# EAGLE board Bus mixer - vco - juno (EAGLE 9.6.2), part 1 of 2
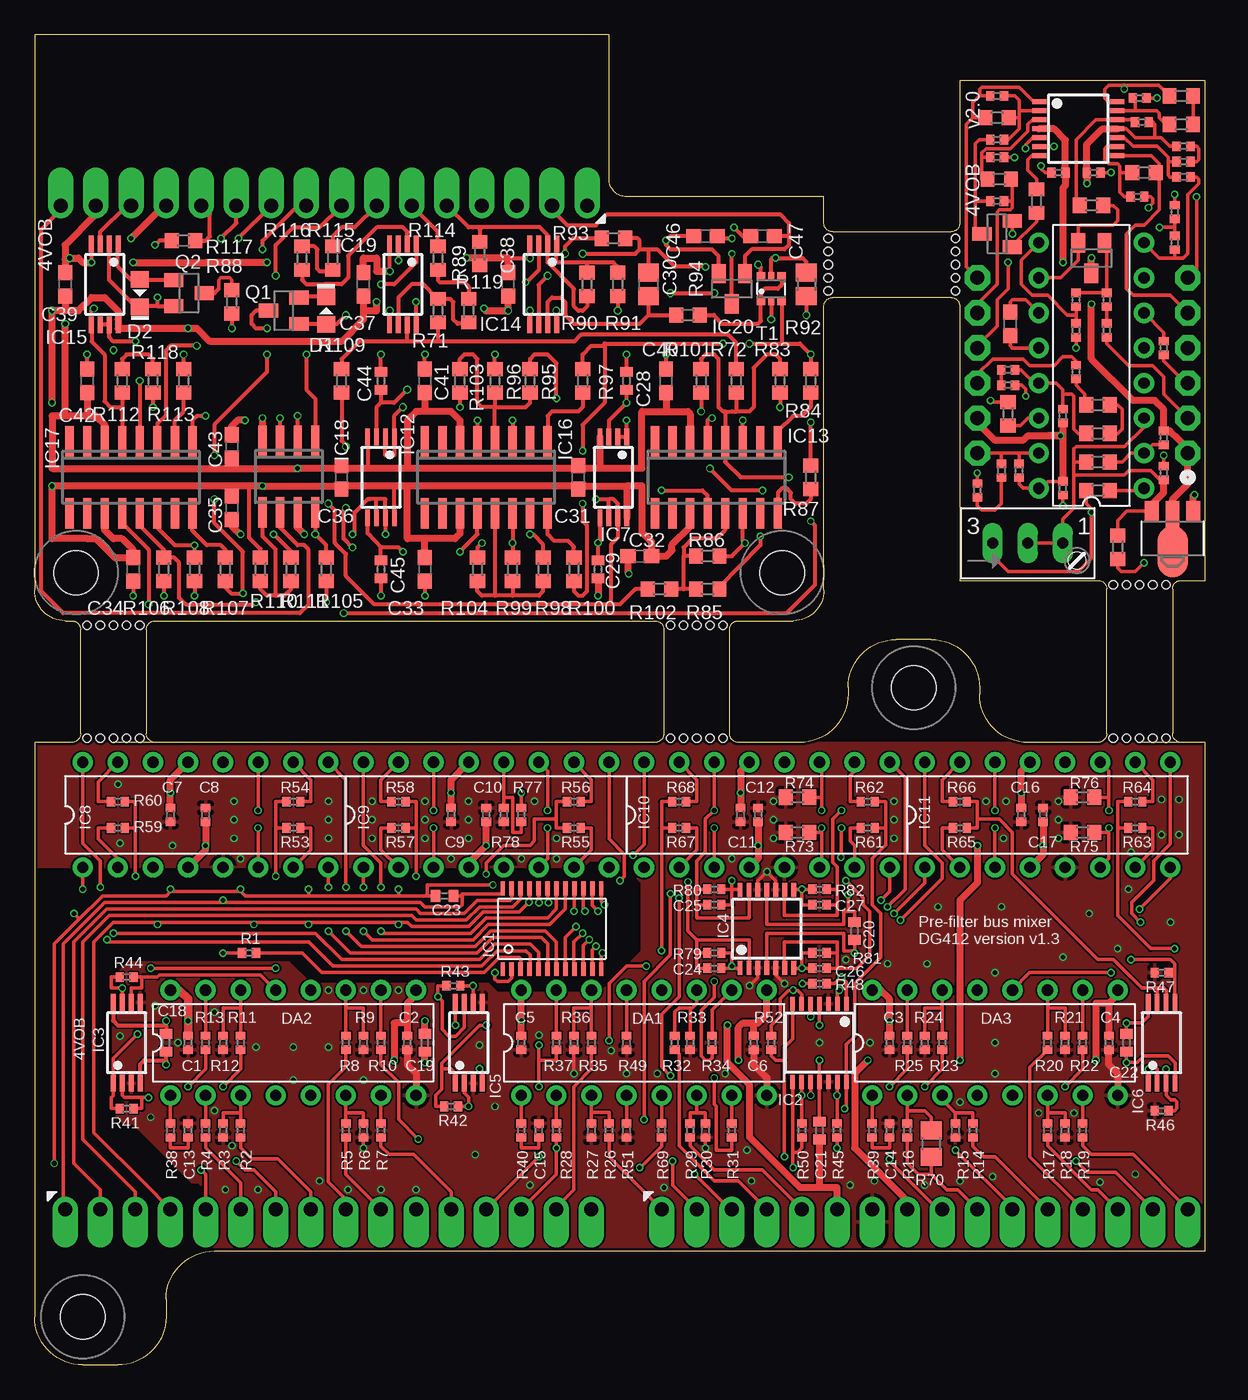
[diagram p0: board, top side]
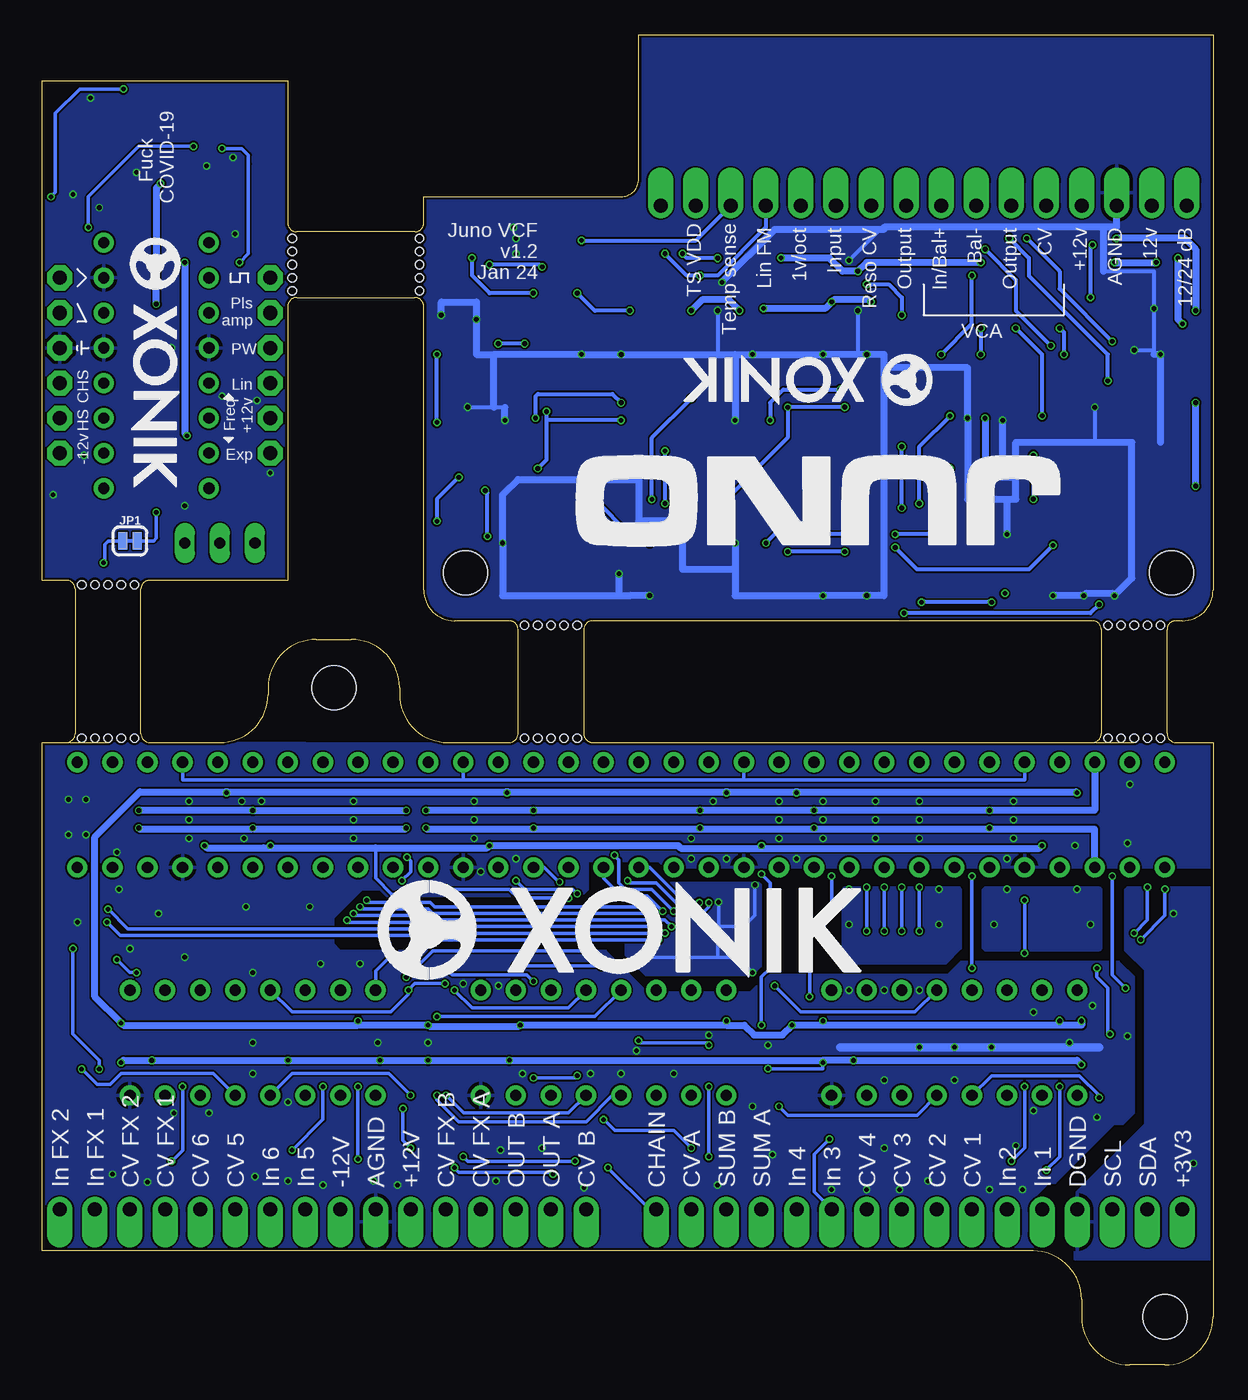
[diagram p1: board, bottom side, seen from below]

Size 84.77 x 96.36 mm. Coordinates in mm from the lower left corner, seen from the top.
Outline: 83.03,45.09 84.77,45.09 84.77,8.26 13.02,8.26 arc90 9.53,4.76 9.53,3.49 arc-90 6.03,0 3.49,0 arc-90 0,3.49 0,45.09 2.7,45.09 arc90 3.33,45.72 3.33,53.26 arc90 2.7,53.9 2.22,53.9 arc-90 0,56.12 0,87.15 0,96.36 41.59,96.36 41.59,85.88 arc90 42.86,84.61 57.15,84.61 57.15,82.71 arc90 57.78,82.07 66.36,82.07 arc90 66.99,82.71 66.99,93.03 84.77,93.03 84.77,56.83 83.03,56.83 arc90 82.39,56.2 82.39,45.72 arc90 83.03,45.09
Outline: 83.03,45.09 80.01,45.09
Outline: 8.73,45.09 11.75,45.09 44.93,45.09 arc90 45.56,45.72 45.56,53.26 arc90 44.93,53.9 8.73,53.9 arc90 8.1,53.26 8.1,45.72 arc90 8.73,45.09
Outline: 8.73,45.09 5.71,45.09
Outline: 76.99,45.09 73.98,45.09 71.91,45.09 arc-90 68.42,48.58 68.42,49.05 arc90 64.93,52.55 62.39,52.55 arc90 58.9,49.05 58.9,48.58 arc-90 55.4,45.09 50.96,45.09 arc-90 50.32,45.72 50.32,53.26 arc-90 50.96,53.9 54.93,53.9 arc90 57.15,56.12 57.15,76.68 arc-90 57.78,77.31 66.36,77.31 arc-90 66.99,76.68 66.99,56.83 76.99,56.83 arc-90 77.63,56.2 77.63,45.72 arc-90 76.99,45.09
Copper layers (1*16): Top 0.035mm / dielectric 1.6mm / Bottom 0.035mm
Design rules "jlcpcb-2layers *": minimum track width 5mil, minimum drill 0.3mm, track to track 5mil, track to pad 5mil, pad to pad 5mil, via to via 5mil, smd to smd 5mil, copper to edge 0.2mm, drill to drill 6mil, minimum pad ring 10mil, minimum via ring 4mil, stop-mask expansion 4mil, vias tented up to drill 0mil, thermal gap 10mil
Holes 3.2 mm at 63.66,49.05 3.49,3.49 54.13,57.38 3.02,57.38
Holes 0.6 mm at 57.47,81.6 57.47,80.64 57.47,79.69 57.47,78.74 57.47,77.79 66.67,81.6 66.67,80.64 66.67,79.69 66.67,78.74 66.67,77.79 81.92,56.52 80.96,56.52 80.01,56.52 79.06,56.52 78.11,56.52 81.92,45.4 80.96,45.4 80.01,45.4 79.06,45.4 78.11,45.4 49.85,45.4 48.9,45.4 47.94,45.4 46.99,45.4 46.04,45.4 7.62,45.4 6.67,45.4 5.71,45.4 4.76,45.4 3.81,45.4 3.81,53.58 46.04,53.58 46.99,53.58 47.94,53.58 48.9,53.58 49.85,53.58 4.76,53.58 5.71,53.58 6.67,53.58 7.62,53.58

## Footprints (pad centres in the part's own frame; a part is rotated, then mirrored left to right if it is on the bottom)
C0402-J = smd 0.6 x 0.7: 1 -0.5,0; 2 0.5,0
C0402 = smd 0.7 x 0.9: 1 -0.65,0; 2 0.65,0
C0805 = smd 1.3 x 1.5: 1 -0.85,0; 2 0.85,0
C0603 = smd 1.1 x 1: 1 -0.85,0; 2 0.85,0
D0805-J = smd 1.2 x 1.3: A 1,0; C -1,0
DIL16J = drill 0.813: 1 -8.89,-3.81; 2 -6.35,-3.81; 3 -3.81,-3.81; 4 -1.27,-3.81; 5 1.27,-3.81; 6 3.81,-3.81; 7 6.35,-3.81; 8 8.89,-3.81; 9 8.89,3.81; 10 6.35,3.81; 11 3.81,3.81; 12 1.27,3.81; 13 -1.27,3.81; 14 -3.81,3.81; 15 -6.35,3.81; 16 -8.89,3.81
TSSOP24J = smd 0.305 x 0.991: 1 -3.575,-2.918; 2 -2.925,-2.918; 3 -2.275,-2.918; 4 -1.625,-2.918; 5 -0.975,-2.918; 6 -0.325,-2.918; 7 0.325,-2.918; 8 0.975,-2.918; 9 1.625,-2.918; 10 2.275,-2.918; 11 2.925,-2.918; 12 3.575,-2.918; 13 3.575,2.918; 14 2.925,2.918; 15 2.275,2.918; 16 1.625,2.918; 17 0.975,2.918; 18 0.325,2.918; 19 -0.325,2.918; 20 -0.975,2.918; 21 -1.625,2.918; 22 -2.275,2.918; 23 -2.925,2.918; 24 -3.575,2.918
TSSOP14J = smd 0.35 x 1: 1 -1.95,-2.825; 2 -1.3,-2.825; 3 -0.65,-2.825; 4 0,-2.825; 5 0.65,-2.825; 6 1.3,-2.825; 7 1.95,-2.825; 8 1.95,2.825; 9 1.3,2.825; 10 0.65,2.825; 11 0,2.825; 12 -0.65,2.825; 13 -1.3,2.825; 14 -1.95,2.825
TSSOP8J = smd 1.2 x 0.35: 1 -2.925,0.975; 2 -2.925,0.325; 3 -2.925,-0.325; 4 -2.925,-0.975; 5 2.925,-0.975; 6 2.925,-0.325; 7 2.925,0.325; 8 2.925,0.975
SO16-NARROW-J = smd 0.6 x 2.2: 1 -4.445,-2.6; 2 -3.175,-2.6; 3 -1.905,-2.6; 4 -0.635,-2.6; 5 0.635,-2.6; 6 1.905,-2.6; 7 3.175,-2.6; 8 4.445,-2.6; 9 4.445,2.6; 10 3.175,2.6; 11 1.905,2.6; 12 0.635,2.6; 13 -0.635,2.6; 14 -1.905,2.6; 15 -3.175,2.6; 16 -4.445,2.6
SO08 = smd 0.6 x 2.2: 1 -1.905,-2.6; 2 -0.635,-2.6; 3 0.635,-2.6; 4 1.905,-2.6; 5 1.905,2.6; 6 0.635,2.6; 7 -0.635,2.6; 8 -1.905,2.6
SOT23J = smd 1 x 1.4: 1 -0.95,-1.1; 2 0.95,-1.1; 3 0,1.1
SOT89 = smd 1 x 1.5: 1 -1.499,-1.981; 3 1.499,-1.981 | smd 1 x 2: 2 0,-1.727 | smd 2.2 x 3.7: 2@1 0,0.94
SMT-JUMPER_2_NC_TRACE_SILK = smd 0.66 x 1.27: 1 -0.521,0; 2 0.521,0
SOT23-BEC = smd 1 x 1.4: B -0.95,-1.1; C 0,1.1; E 0.95,-1.1
R0402 = smd 0.6 x 0.7: 1 -0.5,0; 2 0.5,0
R0805 = smd 1.3 x 1.5: 1 -0.95,0; 2 0.95,0
R0603 = smd 1 x 1.1: 1 -0.85,0; 2 0.85,0
R0805' = smd 1.3 x 1.5: 1 -0.85,0; 2 0.85,0
S64W = drill 0.813 long: A 2.54,1.27; E -2.54,1.27; S 0,1.27
SOT363J = smd 0.6 x 0.6: 1 -0.9,0.75; 3 -0.9,-0.75; 4 0.9,-0.75; 6 0.9,0.75 | smd 0.6 x 0.4: 2 -0.9,0; 5 0.9,0
SIP-PIN16-1J = drill 1.016 offset: 1 -19.05,0; 2 -16.51,0; 3 -13.97,0; 4 -11.43,0; 5 -8.89,0; 6 -6.35,0; 7 -3.81,0; 8 -1.27,0; 9 1.27,0; 10 3.81,0; 11 6.35,0; 12 8.89,0; 13 11.43,0; 14 13.97,0; 15 16.51,0; 16 19.05,0
MA06N-1J = drill 1.016 octagon: 1 -6.35,0; 2 -3.81,0; 3 -1.27,0; 4 1.27,0; 5 3.81,0; 6 6.35,0

## Placement (x,y rotation side)
C1  1uF  [C0402-J]  11.11,23.34 90 top
C2  1uF  [C0402-J]  26.99,23.34 270 top
C3  1uF  [C0402-J]  61.91,23.34 90 top
C4  1uF  [C0402-J]  77.79,23.34 270 top
C5  1uF  [C0402-J]  35.24,23.34 90 top
C6  1uF  [C0402-J]  52.07,23.34 270 top
C7  1uF  [C0402-J]  9.84,39.85 90 top
C8  1uF  [C0402-J]  12.38,39.85 90 top
C9  1uF  [C0402-J]  30.16,39.85 90 top
C10  1uF  [C0402-J]  32.7,39.85 90 top
C11  1uF  [C0402-J]  51.12,39.85 90 top
C12  1uF  [C0402-J]  52.39,39.85 90 top
C13  5nF  [C0402-J]  11.11,16.99 270 top
C14  5nF  [C0402-J]  61.91,16.99 270 top
C15  5nF  [C0402-J]  36.51,16.99 270 top
C16  1uF  [C0402-J]  71.44,39.85 90 top
C17  1uF  [C0402-J]  73.03,39.85 90 top
C18  1uF  [C0402]  9.53,23.34 90 top
C19  1uF  [C0402]  28.26,23.34 90 top
C20  1uF  [C0402]  59.37,31.43 270 top
C21  1uF  [C0402]  56.83,16.99 270 top
C22  1uF  [C0402]  79.06,23.34 90 top
C23  1uF  [C0402]  29.69,33.97 0 top
C24  33pF  [C0402-J]  49.21,29.84 0 top
C25  33pF  [C0402-J]  49.21,33.34 0 top
C26  33pF  [C0402-J]  56.83,29.84 180 top
C27  33pF  [C0402-J]  56.83,33.34 180 top
C28  270p  [C0402]  42.86,71.28 90 top
C29  270p  [C0402]  40.8,57.63 270 top
C30  47p  [C0805]  44.45,78.26 270 top
C31  1uF  [C0603]  39.37,64.29 90 top
C32  1uF  [C0603]  43.81,58.58 180 top
C33  1uF  [C0603]  28.26,57.63 270 top
C34  1uF  [C0603]  7.14,57.63 270 top
C35  1uF  [C0603]  14.29,62.07 270 top
C36  1uF  [C0603]  22.23,64.29 90 top
C37  1uF  [C0603]  23.81,78.26 90 top
C38  1uF  [C0603]  34.29,78.26 90 top
C39  1uF  [C0603]  2.22,78.26 90 top
C40  1uF  [C0603]  45.72,71.28 270 top
C41  1uF  [C0603]  28.26,71.28 270 top
C42  1uF  [C0603]  3.81,71.28 270 top
C43  1uF  [C0603]  14.29,66.52 270 top
C44  270p  [C0402]  25.08,71.28 90 top
C45  270p  [C0402]  25.08,57.63 270 top
C46  1uF  [C0603]  48.58,81.76 180 top
C47  1uF  [C0603]  52.7,81.76 0 top
C48  1uF  [C0402-J]  74.14,86.36 180 top
C49  10pF  [C0402-J]  69.69,91.92 180 top
C50  1uF  [C0402-J]  74.45,63.5 270 top
C51  220p  [C0402-J]  77.63,74.93 90 top
C52  100n  [C0402-J]  75.41,74.93 270 top
C53  10n  [C0402-J]  68.26,63.34 90 top
C54  10n  [C0402-J]  70.48,70.96 0 top
C55  1nF  [C0603]  70.64,75.41 270 top
C56  1n  [C0402-J]  81.76,73.66 90 top
C57  1uF  [C0402-J]  76.68,86.36 180 top
C58  100nF  [C0402-J]  75.41,71.91 90 top
C59  1u  [C0402-J]  81.76,64.61 90 top
D1  1N41480805  [D0805-J]  21.11,76.36 270 top
D2  1N41480805  [D0805-J]  7.62,77.63 90 top
DA1  AS3364D  [DIL16J]  44.13,23.34 0 top
DA2  AS3364D  [DIL16J]  18.73,23.34 0 top
DA3  AS3364D  [DIL16J]  69.53,23.34 0 top
IC1  PCA9539PW  [TSSOP24J]  37.47,31.59 0 top
IC2  TL074JT  [TSSOP14J]  56.83,23.34 180 top
IC3  TL072JT  [TSSOP8J]  6.67,23.34 90 top
IC4  TL074JT  [TSSOP14J]  53.02,31.59 0 top
IC5  TL072JT  [TSSOP8J]  31.43,23.34 90 top
IC6  TL072JT  [TSSOP8J]  81.6,23.34 90 top
IC7  TL072JT  [TSSOP8J]  41.91,64.29 270 top
IC8  DG412-J  [DIL16J]  12.38,39.85 0 top
IC9  DG412-J  [DIL16J]  32.7,39.85 0 top
IC10  DG412-J  [DIL16J]  53.02,39.85 0 top
IC11  DG412-J  [DIL16J]  73.34,39.85 0 top
IC12  TL072JT  [TSSOP8J]  25.08,64.29 270 top
IC13  LM13700SL  [SO16-NARROW-J]  49.37,64.29 180 top
IC14  TL072JT  [TSSOP8J]  36.83,78.26 270 top
IC15  TL072JT  [TSSOP8J]  5.08,78.26 270 top
IC16  LM13700SL  [SO16-NARROW-J]  32.7,64.29 180 top
IC17  LM13700SL  [SO16-NARROW-J]  6.99,64.29 180 top
IC18  DG419DJD  [SO08]  18.41,64.35 180 top
IC19  TL072JT  [TSSOP8J]  26.67,78.26 270 top
IC20  MCP9700TT  [SOT23J]  50.48,77.95 180 top
IC21  CEM3340J  [DIL16J]  76.52,72.39 90 top
IC22  TL074JT  [TSSOP14J]  75.56,89.53 270 top
IC23  79L05F  [SOT89]  82.39,59.85 180 top
JP1  JUMPER-SMT_2_NC_TRACE_SILK-DNM  [SMT-JUMPER_2_NC_TRACE_SILK]  78.42,59.69 0 bottom
Q1  MMBT3906LT1SMD  [SOT23-BEC]  18.05,76.36 90 top
Q2  MMBT3906LT1SMD  [SOT23-BEC]  11.19,77.63 270 top
Q3  MMBT3906LT1SMD  [SOT23-BEC]  76.52,80.17 180 top
R1  10k  [R0402]  15.53,29.84 0 top
R2  33k  [R0402]  14.92,16.99 90 top
R3  22k  [R0402]  13.65,16.99 90 top
R4  47k  [R0402]  12.38,16.99 90 top
R5  33k  [R0402]  22.54,16.99 90 top
R6  22k  [R0402]  23.81,16.99 90 top
R7  47k  [R0402]  25.08,16.99 90 top
R8  33k  [R0402]  22.54,23.34 90 top
R9  22k  [R0402]  23.81,23.34 90 top
R10  47k  [R0402]  25.08,23.34 90 top
R11  33k  [R0402]  14.92,23.34 90 top
R12  22k  [R0402]  13.65,23.34 90 top
R13  47k  [R0402]  12.38,23.34 90 top
R14  33k  [R0402]  67.94,16.99 90 top
R15  22k  [R0402]  66.67,16.99 90 top
R16  47k  [R0402]  63.18,16.99 90 top
R17  33k  [R0402]  73.34,16.99 90 top
R18  22k  [R0402]  74.61,16.99 90 top
R19  47k  [R0402]  75.88,16.99 90 top
R20  33k  [R0402]  73.34,23.34 90 top
R21  22k  [R0402]  74.61,23.34 90 top
R22  47k  [R0402]  75.88,23.34 90 top
R23  33k  [R0402]  65.72,23.34 90 top
R24  22k  [R0402]  64.45,23.34 90 top
R25  47k  [R0402]  63.18,23.34 90 top
R26  33k  [R0402]  41.59,16.99 90 top
R27  22k  [R0402]  40.32,16.99 90 top
R28  47k  [R0402]  37.78,16.99 90 top
R29  33k  [R0402]  47.47,16.99 90 top
R30  22k  [R0402]  48.58,16.99 90 top
R31  47k  [R0402]  50.48,16.99 90 top
R32  33k  [R0402]  46.35,23.34 90 top
R33  22k  [R0402]  47.47,23.34 90 top
R34  47k  [R0402]  49.05,23.34 90 top
R35  33k  [R0402]  40.32,23.34 90 top
R36  22k  [R0402]  39.05,23.34 90 top
R37  47k  [R0402]  37.78,23.34 90 top
R38  100R  [R0402]  9.84,16.99 90 top
R39  100R  [R0402]  60.64,16.99 90 top
R40  100R  [R0402]  35.24,16.99 90 top
R41  47k  [R0402]  6.67,18.57 0 top
R42  47k  [R0402]  30.16,18.73 0 top
R43  47k  [R0402]  30.32,27.46 0 top
R44  47k  [R0402]  6.67,28.1 0 top
R45  47k  [R0402]  58.1,16.99 90 top
R46  47k  [R0402]  81.6,18.41 180 top
R47  47k  [R0402]  81.6,28.42 180 top
R48  47k  [R0402]  56.83,27.62 180 top
R49  47k  [R0402]  42.86,23.34 270 top
R50  47k  [R0402]  55.56,16.99 90 top
R51  47k  [R0402]  42.86,16.99 270 top
R52  47k  [R0402]  53.34,23.34 90 top
R53  47k  [R0402]  18.73,38.89 0 top
R54  47k  [R0402]  18.73,40.8 0 top
R55  47k  [R0402]  39.05,38.89 0 top
R56  47k  [R0402]  39.05,40.8 0 top
R57  47k  [R0402]  26.35,38.89 180 top
R58  47k  [R0402]  26.35,40.8 180 top
R59  47k  [R0402]  6.03,38.89 180 top
R60  47k  [R0402]  6.03,40.8 180 top
R61  47k  [R0402]  60.33,38.89 180 top
R62  47k  [R0402]  60.33,40.8 180 top
R63  47k  [R0402]  79.69,38.89 0 top
R64  47k  [R0402]  79.69,40.8 0 top
R65  47k  [R0402]  66.99,38.89 180 top
R66  47k  [R0402]  66.99,40.8 180 top
R67  47k  [R0402]  46.67,38.89 0 top
R68  47k  [R0402]  46.67,40.8 0 top
R69  47k  [R0402]  45.4,16.99 270 top
R70  DNM  [R0805]  64.93,16.03 90 top
R71  3k3  [R0603]  29.21,76.36 270 top
R72  4k7  [R0603]  50.8,71.28 90 top
R73  220k  [R0603]  55.24,38.58 0 top
R74  220k  [R0603]  55.24,41.12 0 top
R75  220k  [R0603]  75.88,38.58 0 top
R76  220k  [R0603]  75.88,41.12 0 top
R77  47k  [R0402]  35.24,39.85 270 top
R78  33k  [R0402]  33.97,39.85 270 top
R79  47k  [R0402]  49.21,28.73 0 top
R80  47k  [R0402]  49.21,34.45 0 top
R81  47k  [R0402]  56.83,28.73 180 top
R82  47k  [R0402]  56.83,34.45 180 top
R83  560R  [R0603]  53.98,71.28 270 top
R84  8k2  [R0603]  56.2,71.28 90 top
R85  68k  [R0603]  48.74,56.2 180 top
R86  560R  [R0603]  48.74,58.58 180 top
R87  8k2  [R0603]  56.2,64.29 270 top
R88  10k  [R0603]  14.29,76.99 90 top
R89  330k  [R0603]  32.23,80.49 270 top
R90  100k  [R0603]  40.01,78.26 270 top
R91  15k  [R0603]  42.23,78.26 90 top
R92  560R  [R0805']  55.88,78.26 270 top
R93  1M2  [R0603]  41.91,81.6 180 top
R94  1k5  [R0603]  47.31,76.04 180 top
R95  68k  [R0603]  35.88,71.28 90 top
R96  560R  [R0603]  33.34,71.28 90 top
R97  8k2  [R0603]  39.69,71.28 90 top
R98  68k  [R0603]  36.83,57.63 270 top
R99  560R  [R0603]  34.61,57.63 270 top
R100  8k2  [R0603]  39.05,57.63 90 top
R101  68k  [R0603]  48.26,71.28 270 top
R102  68k  [R0603]  45.24,56.2 180 top
R103  68k  [R0603]  30.8,71.28 270 top
R104  68k  [R0603]  32.07,57.63 90 top
R105  100k  [R0603]  21.11,57.63 90 top
R106  1k5  [R0603]  9.37,57.63 270 top
R107  10k  [R0603]  13.81,57.63 270 top
R108  1k5  [R0603]  11.59,57.63 270 top
R109  24k  [R0603]  22.23,71.28 270 top
R110  105k  [R0603]  16.35,57.63 270 top
R111  75k  [R0603]  18.57,57.63 270 top
R112  82k  [R0603]  6.35,71.28 90 top
R113  10k  [R0603]  10.79,71.28 270 top
R114  220k  [R0603]  29.21,80.17 270 top
R115  18k  [R0603]  21.59,80.17 270 top
R116  3k3  [R0603]  19.37,80.17 270 top
R117  10k  [R0603]  10.79,81.44 180 top
R118  4k7  [R0603]  8.57,71.28 270 top
R119  10k  [R0603]  31.43,76.36 270 top
R120  10k  [R0402]  77.63,77.15 90 top
R121  47k  [R0402]  75.41,77.15 90 top
R122  1k8  [R0603]  70.48,68.9 90 top
R123  10k  [R0402]  80.01,91.76 0 top
R124  4.99k  [R0603]  76.52,83.98 0 top
R125  10k  [R0402]  79.85,84.61 0 top
R126  20k  [R0402]  83.19,86.04 0 top
R127  470R  [R0402]  70.01,64.77 90 top
R128  1k  [R0402]  69.69,84.3 0 top
R129  68k  [R0603]  72.55,84.3 90 top
R130  1M5  [R0402]  74.45,68.74 270 top
R131  470R  [R0402]  70.48,72.07 0 top
R132  18k  [R0603]  83.03,89.85 180 top
R133  6k8  [R0603]  80.33,86.36 180 top
R134  200k  [R0603]  69.85,85.88 0 top
R135  100k  [R0402]  69.69,88.74 0 top
R136  100k  [R0402]  69.69,87.47 0 top
R137  200k  [R0603]  69.69,90.33 180 top
R138  10k-DNM  [S64W]  71.91,58.26 0 top
R139  24k  [R0603]  76.99,63.34 180 top
R140  5k6  [R0603]  76.99,65.41 180 top
R141  270k  [R0402]  71.28,64.77 270 top
R142  470k  [R0603]  76.99,67.47 180 top
R143  150k  [R0603]  76.99,69.53 0 top
R144  30k  [R0402]  80.17,90.01 0 top
R145  1k2  [R0603]  83.03,91.92 0 top
R146  30k  [R0402]  83.19,87.15 0 top
R147  30k  [R0402]  83.19,88.27 180 top
R148  1k  [R0402]  82.55,81.28 90 top
R149  1k  [R0402]  82.55,83.5 90 top
R150  1M5  [R0402]  81.76,67.15 90 top
R151  2k7  [R0603]  78.42,59.21 90 top
T1  BC857BS  [SOT363J]  53.34,77.95 90 top
T2  2n3904  [SOT23-BEC]  69.69,81.92 90 top
U$1  [XONIK_LOGO_35]  60.48,27.94 0 bottom
U$2  MA16-1JP-FEMALE  [SIP-PIN16-1J]  64.45,11.27 0 top
U$3  MA16-1JP-FEMALE  [SIP-PIN16-1J]  21.27,11.27 0 top
U$4  [JUNO_35]  11.11,65.88 180 bottom
U$5  [XONIK_LOGO_18]  20.32,73.18 180 bottom
U$6  MA16-1JP-FEMALE-ANGLED  [SIP-PIN16-1J]  20.95,83.98 180 top
U$7  [XONIK_LOGO_18]  78.42,81.6 270 bottom
X1  MA06-1JN-DNM  [MA06N-1J]  83.5,72.39 270 top
X2  MA06-1JN-DNM  [MA06N-1J]  68.26,72.39 90 top

## Library data of the parts
C1-C17 C24-C27 C48-C54 C56-C59 D1 D2 DA1-DA3 IC1-IC17 IC19-IC23 T1 U$1-U$7 X1 X2 = joakim
C18-C23 C28 C29 C31-C47 C55 = rcl; SPICEPREFIX: C
C30 R92 = resistor
IC18 = linear
JP1 = SparkFun-Jumpers
Q1-Q3 = transistor-pnp
R1-R91 R93-R137 R139-R151 = rcl; SPICEPREFIX: R
R138 = pot
T2 = transistor-neu-to92

## Nets
2P4P: IC18.6 U$6.16
!RST: IC1.3 R1.2
+3V3: C23.2 IC1.24 R1.1 U$3.1
+5V: IC18.5 R110.2 R111.2
+12V: C1.2 C3.2 C5.2 C7.2 C9.2 C11.2 C16.2 C18.2 C19.2 C20.2 C21.2 C22.2 DA1.16 DA2.16 DA3.16 IC2.4 IC3.8 IC4.4 IC5.8 IC6.8 IC8.13 IC9.13 IC10.13 IC11.13 R77.1 U$2.6
+12V1: C31.1 C32.1 C33.1 C34.1 C35.1 C36.1 C37.1 C38.1 C39.1 IC7.8 IC12.8 IC13.11 IC14.8 IC15.8 IC16.11 IC17.11 IC18.4 IC19.8 R110.1 R113.1 U$6.13
+12V2: C48.1 C50.1 IC21.16 IC22.4 R130.2 R141.2 X2.2
-5V: C59.1 IC21.3 IC23.3 R138.A R138.S R140.2 R151.2
-12V: C2.1 C4.1 C6.1 C8.1 C10.1 C12.1 C17.1 C18.1 C19.1 C20.1 C21.1 C22.1 DA1.9 DA2.9 DA3.9 IC2.11 IC3.4 IC4.11 IC5.4 IC6.4 IC8.4 IC9.4 IC10.4 IC11.4 U$2.8
-12V1: C31.2 C36.2 C37.2 C38.2 C39.2 C40.2 C41.2 C42.2 C43.2 IC7.4 IC12.4 IC13.6 IC14.4 IC15.4 IC16.6 IC17.6 IC18.7 IC19.4 R89.2 R93.2 U$6.15
-12V2: C57.2 IC22.11 IC23.2 IC23.2@1 Q3.C R144.2 R147.2 R150.2 X1.6
AMP_CV: R128.2 R134.2 X2.5
BAL-: IC17.4 U$6.10
BUS_A: C24.1 IC4.2 IC8.3 IC8.6 IC9.3 IC9.6 IC10.3 IC10.6 R73.2 R79.1
BUS_B: C25.1 IC4.13 IC8.11 IC8.14 IC9.11 IC9.14 IC10.11 IC10.14 R74.2 R80.1
BUS_FX_A: C26.1 IC4.6 IC11.3 IC11.6 R75.2 R81.1
BUS_FX_B: C27.1 IC4.9 IC11.11 IC11.14 R76.2 R82.1
CEM_HSYNC_IN: C56.1 X1.4
CON1: DA2.13 IC3.6 R44.2
CON2: DA2.4 IC3.2 R41.2
CON3: DA2.12 IC5.6 R43.2
CON4: DA2.5 IC5.2 R42.2
CON5: DA3.13 IC2.2 R48.2
CON6: DA3.4 IC2.13 R45.2
CON_O1: DA1.12 IC2.6 R52.2
CORE_OUT: IC18.1 U$6.8
CUTOFF_CV: IC14.2 R89.1 R90.2 U$6.5
CUTOFF_IABC: R84.2 R87.1 R97.2 R100.1 T1.3
CUTOFF_LIN_FM: C30.1 IC14.6 R93.1 T1.6 U$6.4
CUTOFF_TRACK_2: IC14.1 R90.1 R91.2
CV1: R11.1 U$3.7
CV2: R2.1 U$3.8
CV2_IN: DA2.3 R2.2 R3.2
CV3: R8.1 U$3.9
CV4: R5.1 U$3.10
CV5: R23.1 U$2.11
CV6: R14.1 U$2.12
CV6_IN: DA3.3 R14.2 R15.2
CV_A_DRY: R35.1 U$3.15
CV_A_WET: R32.1 U$2.4
CV_B_DRY: R26.1 U$2.1
CV_B_WET: R29.1 U$2.5
CV_FX1: R20.1 U$2.13
CV_FX2: R17.1 U$2.14
CV_O2: DA1.3 R26.2 R27.2
DGND: C23.1 IC1.2 IC1.12 IC1.21 U$3.4
DIG_1_BUS_A: IC1.4 IC8.1
DIG_1_BUS_B: IC1.5 IC8.16
DIG_2_BUS_A: IC1.6 IC8.8
DIG_2_BUS_B: IC1.7 IC8.9
DIG_3_BUS_A: IC1.17 IC9.1
DIG_3_BUS_B: IC1.18 IC9.16
DIG_4_BUS_A: IC1.19 IC9.8
DIG_4_BUS_B: IC1.20 IC9.9
DIG_5_BUS_A: IC1.15 IC10.1
DIG_5_BUS_B: IC1.16 IC10.16
DIG_6_BUS_A: IC1.13 IC10.8
DIG_6_BUS_B: IC1.14 IC10.9
DIG_7_BUS_A: IC1.8 IC11.1
DIG_7_BUS_B: IC1.9 IC11.16
DIG_8_BUS_A: IC1.10 IC11.8
DIG_8_BUS_B: IC1.11 IC11.9
FB_IABC: Q2.C R88.2
FREQ_CV: IC21.15 R127.2 R141.1 X2.1
GND: C1.1 C2.2 C3.1 C4.2 C5.1 C6.2 C7.1 C8.2 C9.1 C10.2 C11.1 C12.2 C13.1 C14.1 C15.1 C16.1 C17.2 DA1.8 DA2.8 DA3.8 IC2.3 IC2.12 IC3.3 IC3.5 IC4.3 IC4.5 IC4.10 IC4.12 IC5.3 IC5.5 IC8.5 IC9.5 IC10.5 IC11.5 R3.1 R6.1 R9.1 R12.1 R15.1 R18.1 R21.1 R24.1 R27.1 R30.1 R33.1 R36.1 R46.2 R47.2 R49.2 R51.2 R73.1 R74.1 R75.1 R76.1 R78.2 U$2.7
GND1: C28.2 C29.2 C32.2 C33.2 C34.2 C35.2 C40.1 C41.1 C42.1 C43.1 C44.2 C45.2 C46.1 C47.1 IC13.3 IC13.14 IC14.3 IC14.5 IC15.3 IC16.3 IC16.14 IC18.3 IC19.3 IC19.5 IC20.3 R83.2 R86.1 R92.2 R96.2 R99.1 R106.2 R108.2 R111.1 R118.2 T1.2 U$6.14
GND2: C48.2 C50.2 C52.2 C53.2 C54.2 C55.2 C57.1 C59.2 IC21.5 IC21.7 IC21.12 IC23.1 R122.2 R123.2 R125.2 R136.2 R149.2 T2.E X1.3
HARD_SYNC: C56.2 IC21.6
HSYNC_IN: C51.1 X1.5
IN: R114.1 U$6.6
IN1: R13.1 U$3.5
IN2: R4.1 U$3.6
IN3: R10.1 U$3.11
IN4: R7.1 U$3.12
IN5: R25.1 U$2.9
IN6: R16.1 R70.1 U$2.10
IN_FX1: R22.1 U$2.15
IN_FX2: R19.1 U$2.16
IN_O1: DA1.15 R37.2
IN_O2: DA1.2 R28.2
IN_O3: DA1.10 R34.2
IN_O4: DA1.7 R31.2
LIN_FM: IC21.13 R130.1 R131.2 R142.2
LIN_FM_IN: C58.2 X2.3
N$1: DA3.1 R39.2
N$2: DA2.1 R38.2
N$3: DA3.6 R17.2 R18.2
N$4: DA3.5 IC6.3 R46.1
N$5: DA3.11 R20.2 R21.2
N$6: DA1.5 IC2.9 R50.2 R69.1
N$7: DA3.14 R23.2 R24.2
N$8: C14.2 R39.1
N$9: DA1.1 R40.2
N$10: DA2.6 R5.2 R6.2
N$11: DA1.6 R29.2 R30.2
N$12: DA2.11 R8.2 R9.2
N$13: DA1.11 R32.2 R33.2
N$14: C13.2 R38.1
N$15: DA1.14 R35.2 R36.2
N$16: C15.2 R40.1
N$17: DA1.4 IC2.10 R51.1
N$18: DA1.13 IC2.5 R49.1
N$19: DA3.12 IC6.5 R47.1
N$20: IC13.1 R84.1
N$21: DA2.14 R11.2 R12.2
N$22: IC13.16 R87.2
N$23: IC13.4 IC17.12 R72.1 R83.1 R101.1
N$24: C28.1 IC7.3 IC13.5
N$25: IC13.13 R85.2 R86.2 R102.1
N$26: C29.1 IC7.5 IC13.12
N$27: D1.A IC19.1 Q1.B
N$28: IC16.1 R97.1
N$29: IC16.16 R100.2
N$30: IC16.4 R95.1 R96.1 R103.1
N$31: C44.1 IC12.3 IC16.5
N$32: D2.A IC15.1 Q2.B
N$33: IC16.13 R98.2 R99.2 R104.1
N$34: C45.1 IC12.5 IC16.12
N$35: IC12.6 IC12.7 IC18.8 R104.2 R105.2
N$36: IC17.16 R107.1
N$37: IC7.6 IC7.7 IC18.2 R95.2 R102.2
N$38: IC17.13 R105.1 R106.1
N$39: IC17.14 R108.1 R109.2
N$40: IC12.1 IC12.2 R98.1 R103.2
N$41: IC17.1 R88.1
N$42: R91.1 R92.1 T1.5
N$43: C30.2 IC14.7 R94.2
N$44: IC17.2 R113.2
N$45: R94.1 T1.1 T1.4
N$46: IC15.5 IC17.5 R112.1
N$47: IC19.6 R71.1 R119.2
N$48: R115.2 R116.1
N$49: R112.2 R118.1
N$50: R114.2 R119.1
N$51: IC21.14 R122.1
N$52: JP1.1 R151.1
N$53: IC21.1 R139.1
N$54: C53.1 R127.1
N$55: C54.1 R131.1
N$56: C51.2 R120.1
N$57: Q3.B R120.2 R121.2
N$58: IC22.13 R123.1 R132.2
N$59: IC22.9 R125.1 R133.2
N$60: IC22.7 R129.2
N$61: R129.1 T2.B
N$62: R128.1 R135.1 T2.C
N$63: IC22.3 R134.1 R136.1
N$64: C49.1 IC22.2 R135.2 R137.1
N$65: C52.1 IC21.9 R121.1
N$66: R142.1 R143.2
N$67: C58.1 R143.1
N$68: IC22.12 R124.1 R144.1
N$69: R132.1 R145.2
N$70: IC22.10 R126.1 R146.1
N$71: IC21.2 R140.1 R150.1
N$72: R146.2 R147.1
N$73: IC22.6 R148.2 R149.1
N$74: JP1.2 R138.E R139.2
N$80: IC7.1 IC7.2 R85.1 R101.2
OUT1: IC3.7 R44.1 R59.1 R60.1
OUT2: IC3.1 R41.1 R53.1 R54.1
OUT3: IC5.7 R43.1 R57.1 R58.1
OUT4: IC5.1 R42.1 R55.1 R56.1
OUT5: IC2.1 R48.1 R67.1 R68.1
OUT6: IC2.14 R45.1 R61.1 R62.1
OUT7: IC6.6 IC6.7 R65.1 R66.1
OUT8: IC6.1 IC6.2 R63.1 R64.1
OUT_A: IC2.7 R52.1 U$2.2
OUT_B: IC2.8 R50.1 U$2.3
PULSE_OUT: C49.2 IC22.1 R137.2 X2.6
PW_CV: IC22.5 X2.4
RESO_CV: R115.1 U$6.7
RESO_I_ABC: Q1.C R107.2
RESO_SUM: D1.C IC19.2 Q1.E R116.2
SAW_CEM: IC21.8 R126.2 R148.1
SAW_CENTERED: IC22.8 R133.1 X1.2
SCL: IC1.22 U$3.3
SDA: IC1.23 U$3.2
SUM1: DA2.15 R13.2
SUM2: DA2.2 R4.2
SUM3: DA2.10 R10.2
SUM4: DA2.7 R7.2
SUM5: DA3.15 R25.2
SUM6: DA3.2 R16.2 R70.2
SUM7: DA3.10 R22.2
SUM8: DA3.7 R19.2
SUM_A: C24.2 IC4.1 R37.1 R79.2 U$3.13
SUM_B: C25.2 IC4.14 R28.1 R80.2 U$3.14
SUM_FX_A: C26.2 IC4.7 R34.1 R81.2
SUM_FX_B: C27.2 IC4.8 R31.1 R82.2
SVF1_IN: IC19.7 R71.2 R72.2 R109.1
SVF_CHAIN: R69.2 U$3.16
SW1A: IC8.2 R59.2
SW1B: IC8.15 R60.2
SW2A: IC8.7 R53.2
SW2B: IC8.10 R54.2
SW3A: IC9.2 R57.2
SW3B: IC9.15 R58.2
SW4A: IC9.7 R55.2
SW4B: IC9.10 R56.2
SW5A: IC10.2 R67.2
SW5B: IC10.15 R68.2
SW6A: IC10.7 R61.2
SW6B: IC10.10 R62.2
SW7A: IC11.2 R65.2
SW7B: IC11.15 R66.2
SW8A: IC11.7 R63.2
SW8B: IC11.10 R64.2
TEMP_SENSE: C46.2 IC20.2 U$6.3
TIMING_CAP: C55.1 IC21.11
TRI_CEM: IC21.10 Q3.E R124.2
TRI_CENTERED: IC22.14 R145.1 X1.1
TS_VDD: C47.2 IC20.1 U$6.2
VCA_CV: R117.1 U$6.12
VCA_IN: IC17.3 U$6.9
VCA_OUT: IC15.6 IC15.7 U$6.11
VCA_SUM: D2.C IC15.2 Q2.E R117.2
VL: IC8.12 IC9.12 IC10.12 IC11.12 R77.2 R78.1